# EAGLE board adapter (EAGLE 9.6.2)
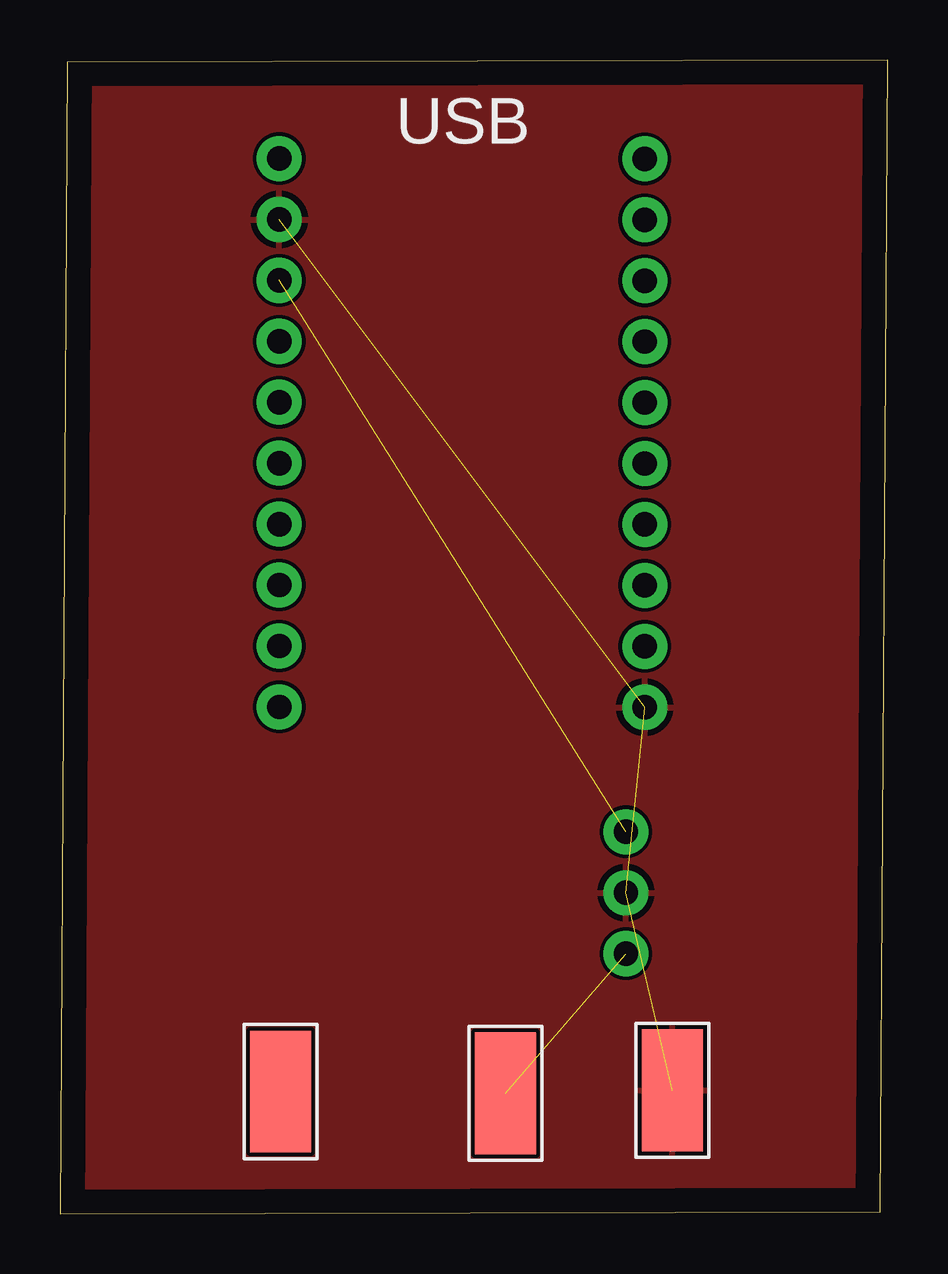
[diagram p0: board, top side]
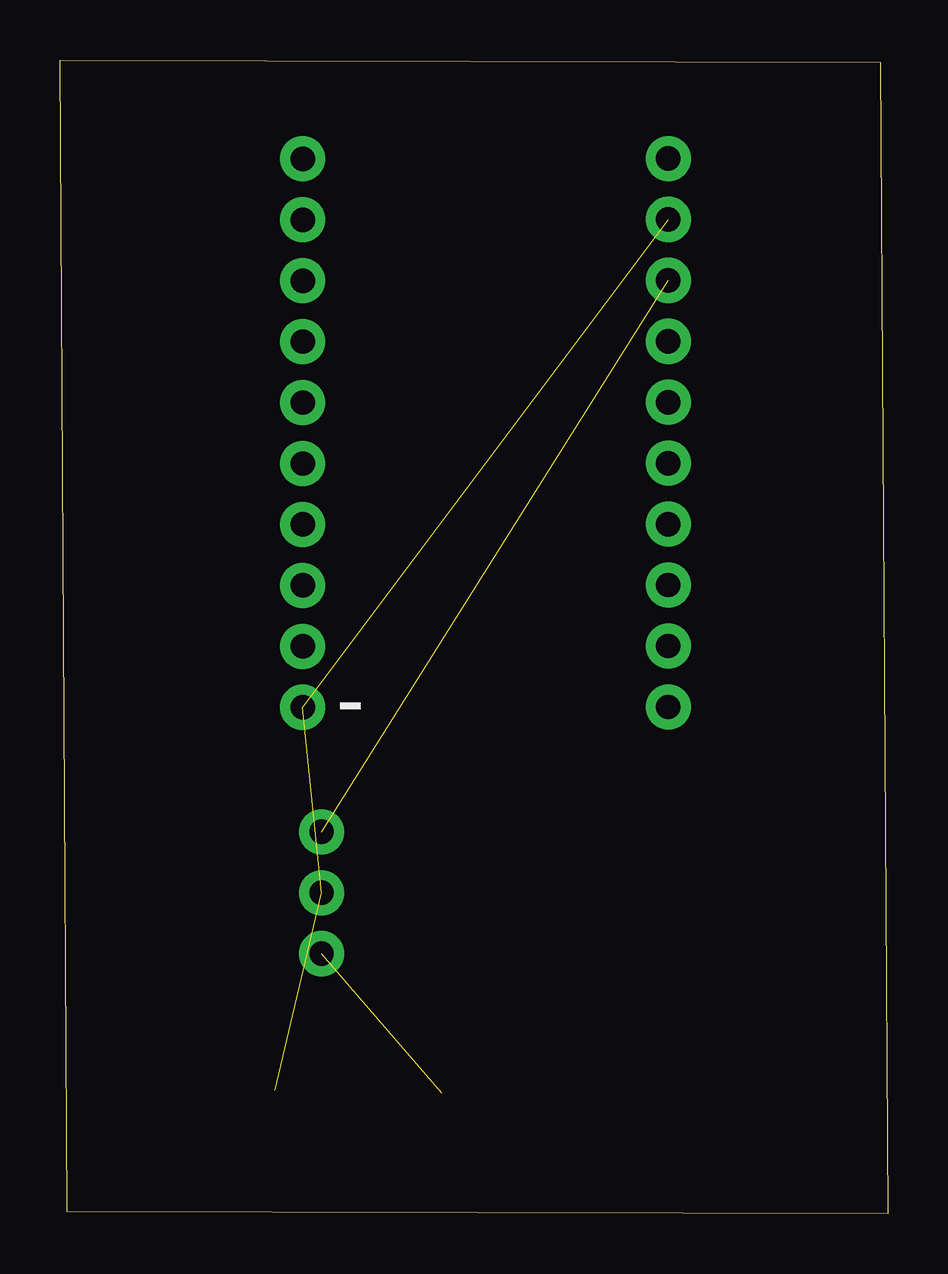
[diagram p1: board, bottom side, seen from below]

Size 34.5 x 48.1 mm. Coordinates in mm from the lower left corner, seen from the top.
Outline: 0,0 34.2,0.1 34.5,48.1 0.3,48 0,0
Copper layers (1*16): Top 0.035mm / dielectric 1.5mm / Bottom 0.035mm
Design rules "default": minimum track width 6mil, minimum drill 0.35mm, track to track 6mil, track to pad 6mil, pad to pad 6mil, via to via 6mil, smd to smd 6mil, copper to edge 40mil, drill to drill 6mil, minimum pad ring 10mil, minimum via ring 8mil, stop-mask expansion 4mil, vias tented up to drill 0mil, thermal gap 10mil

## Footprints (pad centres in the part's own frame; a part is rotated, then mirrored left to right if it is on the bottom)
5-2,5 = smd 2.54 x 5.08: 1 0,0
1X10_NO_SILK = drill 1.016 pad 1.88: 1 0,0; 2 2.54,0; 3 5.08,0; 4 7.62,0; 5 10.16,0; 6 12.7,0; 7 15.24,0; 8 17.78,0; 9 20.32,0; 10 22.86,0
1X03_NO_SILK = drill 1.016 pad 1.88: 1 0,0; 2 2.54,0; 3 5.08,0

## Placement (x,y rotation side)
GND  WIREPADSMD5-2,5  [5-2,5]  25.53,5.14 0 top
GND1  WIREPADSMD5-2,5  [5-2,5]  9.2,5.1 180 top
J1  [1X10_NO_SILK]  9.14,43.99 270 bottom
J2  [1X10_NO_SILK]  24.38,43.98 270 bottom
J3  [1X03_NO_SILK]  23.6,15.93 270 top
VBAT  WIREPADSMD5-2,5  [5-2,5]  18.58,5.03 0 top

## Library data of the parts
GND GND1 VBAT = wirepad
J1-J3 = SparkFun-Connectors

## Nets
3V3: J1.4
5V: J1.3 J3.1
GND: GND.1 J1.2 J2.10 J3.2
M1: J1.10
M2: J1.9
M3: J1.8
M4: J1.7
MISO: J2.2
MOSI: J2.1
RX1: J2.7
SBUS: GND1.1
SCK: J2.3
SCL: J2.5
SDA: J2.6
SS: J2.4
TX1: J2.8
VBAT: J3.3 VBAT.1

## Tracks (layer width: path | path; a pad name or v marks a point on that pad's centre or on a via)
5V  (1 unrouted)
  Bottom 0.152: J1.3 9.24,39.01
GND  (3 unrouted)
  pour Top: -9.85,65 45.8,65 45.8,-0.25 -9.85,-0.25
VBAT  (1 unrouted)

## Text on the board
tNames: USB
bNames: -